# Altium PCB 10515.0502_CVSP1_2020 1P.PcbDoc (part 1 of 2)
Units mm, origin at the board's own origin, x right, y up, seen from the top; angles counter-clockwise.
Board outline 150.42 x 82.13 mm, 2 copper layers (Top Layer, Bottom Layer); 61 components, 37 nets, 190 pads, 35 vias.
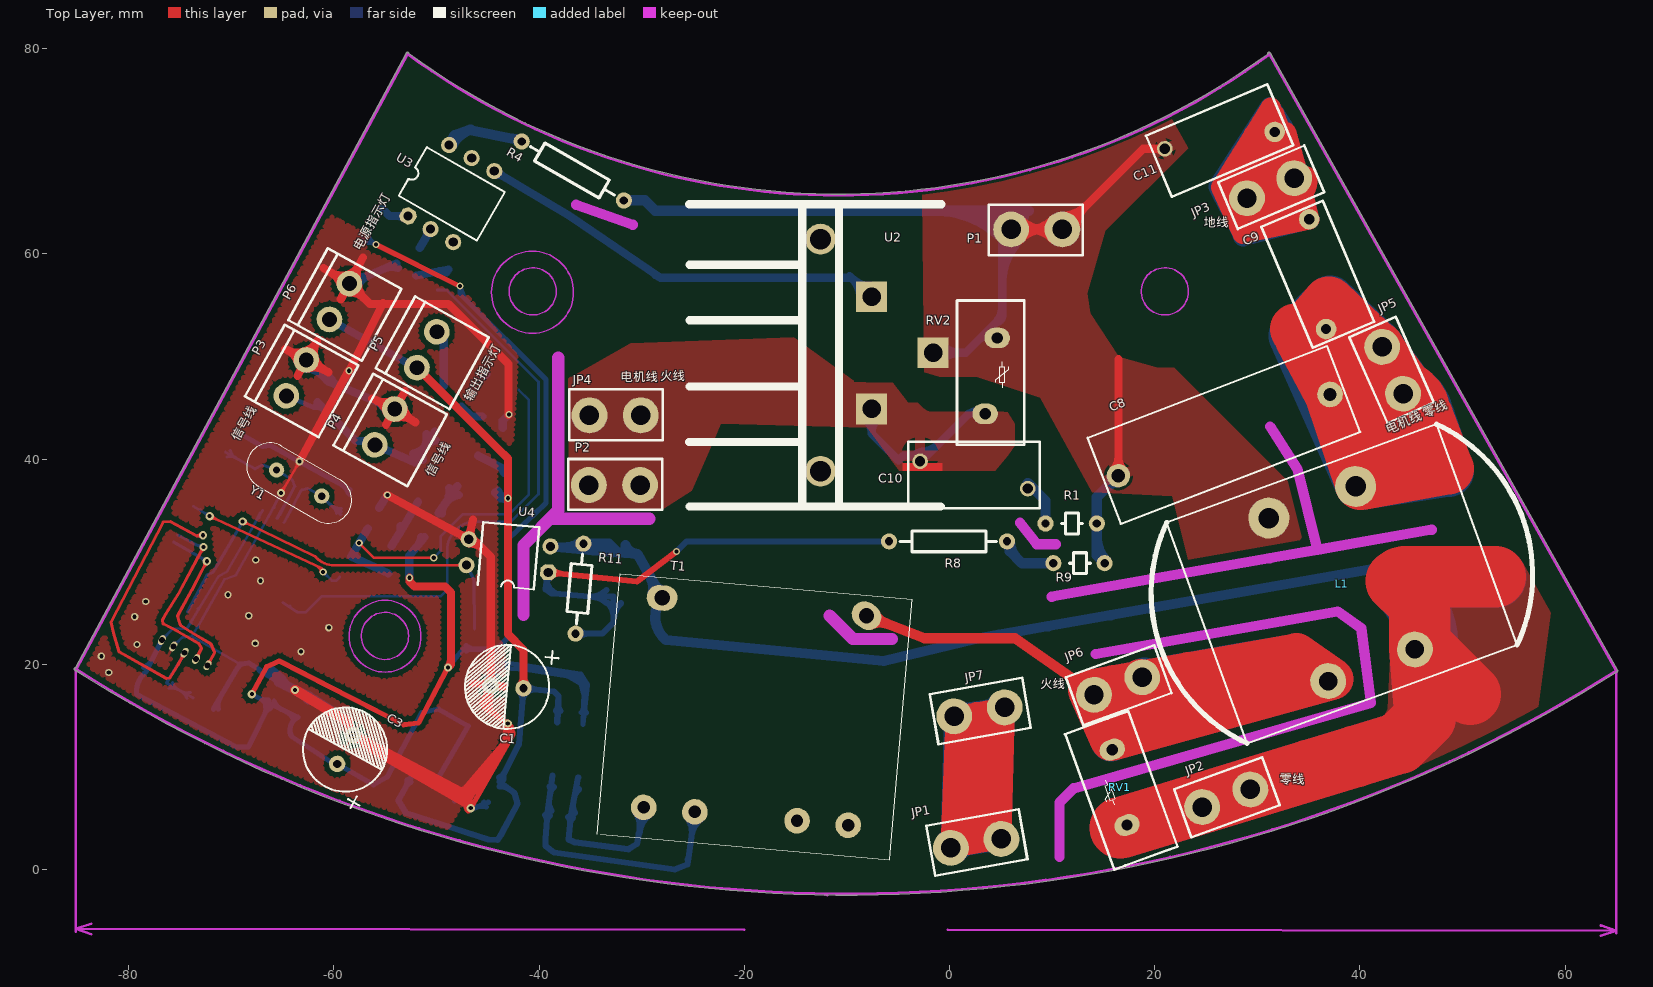
[diagram p0: Top Layer view]
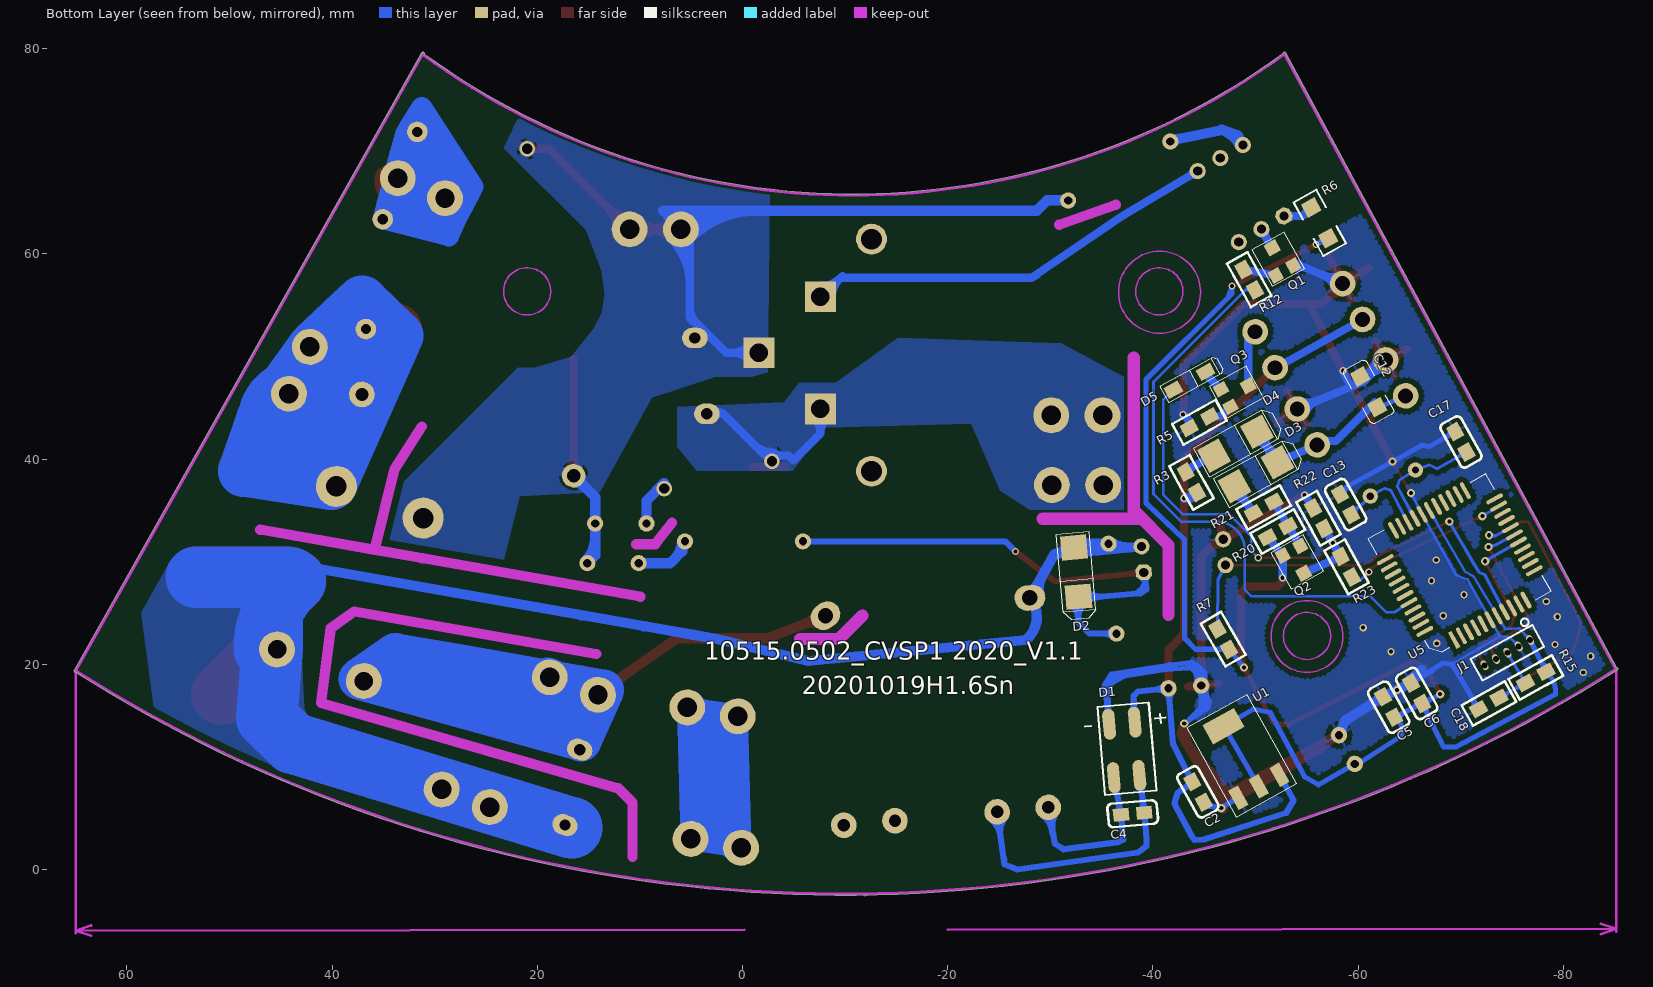
[diagram p1: Bottom Layer view, seen from below]

## Layer stack, top to bottom
Top Layer: signal copper 0.0356
Dielectric: dielectric 0.32, FR-4, Dk 4.8
Bottom Layer: signal copper 0.0356

## Board outline
-85.236,19.438 cw(c-9.954,137.626) -85.244,19.443 cw(c-85.176,19.551) -85.165,19.678 -52.966,79.507 cw(c-52.842,79.48) -52.933,79.569 cw(c-52.82,79.509) -52.695,79.53 ccw(c-10.798,136.693) 31.018,79.471 cw(c31.139,79.509) 31.25,79.571 31.268,79.54 cw(c31.19,79.439) 31.316,79.454 65.097,19.434 cw(c64.986,19.371) 65.113,19.371 cw(c64.986,19.371) 65.053,19.263 cw(c-9.954,137.626) -85.119,19.364 cw(c-85.12,19.491)

## Design rules (kind name [scope] priority, off if disabled: settings)
Clearance Clearance_2 [InPolygon] p1: gap=0.5
Clearance [All] p2: gap=0.2
HoleSize [All] p1 off: absolutevalues=TRUE maxlimit=4.54 minlimit=0.025 maxpercent=80.000 minpercent=20.000
HoleToHoleClearance [All] p1 off: gap=0.254 allowstackedmicrovias=TRUE
LayerPairs [All] p1 off: enforce=TRUE
MinimumSolderMaskSliver [All] p1 off: minsoldermaskwidth=0.254
NetAntennae [All] p1 off: netantennaetolerance=0
PlaneConnect [InNet('GND')] p1: planeconnectstyle=Direct reliefexpansion=0.508 reliefentries=4 reliefconductorwidth=0.254 reliefairgap=0.254
PolygonConnect PolygonConnect_5 [(InNet('EARTH'))] p1: connectstyle=Direct reliefconductorwidth=0.254 reliefentries=4 polygonreliefangle="90 Angle"
PolygonConnect PolygonConnect_4 [(HasFootprint('CAP/1KV'))] p2: connectstyle=Relief reliefconductorwidth=1 reliefentries=4 polygonreliefangle="90 Angle"
PolygonConnect PolygonConnect_3 [(HasFootprint('10D471'))] p3: connectstyle=Relief reliefconductorwidth=1 reliefentries=4 polygonreliefangle="90 Angle"
PolygonConnect PolygonConnect_2 [(HasFootprint('CAP/0.47U/250V'))] p4: connectstyle=Relief reliefconductorwidth=1 reliefentries=4 polygonreliefangle="90 Angle"
PolygonConnect PolygonConnect_1 [All vs InNet('MOTO_A')  Or InNet( MOTO_B)  Or InNet( L_DETECT)] p5: connectstyle=Direct reliefconductorwidth=0.254 reliefentries=4 polygonreliefangle="90 Angle"
PolygonConnect [All vs Isvia] p6: connectstyle=Direct reliefconductorwidth=0.254 reliefentries=4 polygonreliefangle="90 Angle"
RoutingVias [All] p1: holewidth=0.4 width=0.8 viastyle="Through Hole" minholewidth=0.3 minwidth=0.3 maxholewidth=0.711 maxwidth=1.27
SilkToSilkClearance [All] p1 off: silktosilkclearance=0.254
SilkscreenOverComponentPads [IsPad] p1 off: minsilkscreentomaskgap=0.254
SolderMaskExpansion [All] p1: expansion=0.102
Width [All] p1: maxlimit=6 minlimit=0.254 preferedwidth=0.8
20 further rules are at their usual default settings.

## Components (designator, comment, footprint, x,y, rotation, side; value= is the part's Value field where it differs from the comment)
C1 "Cap Pol1" CAP/3.2MM*12MM*8MM -41.529,17.653 r265 top
C2 "Cap" 0805C -44.958,6.54 r331 bottom
C3 "Cap Pol1" CAP/3.2MM*12MM*8MM -59.69,10.287 r151 top
C4 "X7R/0.1uF/50V/±10%/0805" 0805C -39.179,5.524 r265 bottom
C5 "0805/105/25V" 0805C -62.42,16.828 r151 bottom
C6 "X7R/0.1uF/50V/±10%/0805" 0805C -65.151,18.161 r151 bottom
C8 "0.47uf/275v" CAP/0.47U/250V 37.084,46.291 r201 top
C9 "2.2nf/250v" CAP/1KV#1 35.052,63.373 r203 top
C10 "Cap" CAP/1KV#2 -2.877,39.785 r270 top
C11 "2.2nf/250v" CAP/1KV#3 31.686,71.882 r113 top
C12 "Cap" CAP/SMT/1206C -60.175,48.05 r241 bottom (schematic designator R6)
C13 "Cap" 0805C -58.229,36.576 r151 bottom
C17 "Cap" 0805C -69.469,42.672 r151 bottom
C18 "0805/104/25V" 0805R -71.755,15.621 r61 bottom
D1 "Bridge2" MB6S(SMT-4) -36.195,8.954 r85 bottom
D2 "IN4007" M7 -32.322,31.369 r175 bottom
D3 "M7" M7 -47.95,37.35 r61 bottom (schematic designator D2)
D4 "M7" M7 -45.975,40.325 r61 bottom (schematic designator D2)
D5 "1N4148/SOD-123" D/SMT/SOD-123 -43.575,47.625 r331 bottom
J1 "CON5" CON_LCD3 -76.772,22.352 r241 bottom
JP1 "AC-220V" CON-1PIN 5.05,2.975 r280 top
JP2 "AC-220V" CON-1PIN 29.316,7.794 r290 top
JP3 "EARTH" CON-1PIN 33.591,67.373 r293 top
JP4 "MOTO_A" CON-1PIN -30.099,44.259 r270 top
JP5 "MOTO_B" CON-1PIN 42.164,50.927 r24 top
JP6 "MOTO_A" CON-1PIN 18.775,18.725 r290 top
JP7 "MOTO_A" CON-1PIN 5.38,15.791 r280 top (schematic designator JP1)
L1 "10mh" L1 39.575,37.325 r110 top
P1 "Header 1" CON/1PIN 5.994,62.382 r90 top
P2 "Header 1" CON/1PIN -30.162,37.465 r270 top
P3 "Header 2" CON-4.0MM*2 -62.704,49.657 r241 top locked
P4 "Header 2" CON-4.0MM*2 -54.075,44.875 r241 top
P5 "Header 2" CON-4.0MM*2 -49.975,52.4 r241 top
P6 "Header 2" CON-4.0MM*2 -58.5,57.1 r241 top
Q1 "NPN_SS8050" BJT/SMT/SOT-23 -51.975,57.9 r151 bottom
Q2 "PNP_SS8550" BJT/SMT/SOT-23 -54.375,31.525 r331 bottom (schematic designator Q1)
Q3 "NPN_SS8050" BJT/SMT/SOT-23 -46.625,46.8 r241 bottom
R1 "RES" R(DIP/0.25W) 14.351,33.718 r270 top
R3 "Res1" 0805R -43.2,38.725 r151 bottom
R4 "200R/AXIAL0.4/0.5w" RDIP/0.4/0.5W -41.7,70.95 r60 top
R5 "Res1" 0805R -43.55,43.025 r61 bottom
R6 "Res1" 1206R -57.1,61.525 r61 bottom
R7 "0805/10K/1/8W" 0805R -46.291,23.431 r150 bottom
R8 "47K/axial0.4/1W" RDIP/0.4/0.5W 5.6,31.975 r270 top
R9 "47K/axial0.4/1W" R(DIP/0.25W) 15.113,29.845 r270 top
R11 "10K/axial0.3/0.25W" R[DIP/0.3/0.25W] -35.687,31.75 r355 top
R12 "Res1" 0805R -49.95,56.475 r331 bottom
R15 "Res1" 0805R -76.327,18.161 r61 bottom
R20 "Res2" 0805R -53.175,33.475 r241 bottom (schematic designator R12)
R21 "Res2" 0805R -49.8,34.725 r61 bottom (schematic designator R12)
R22 "Res2" 0805R -55.6,35.225 r151 bottom (schematic designator R12)
R23 "Res2" 0805R -59.425,28.5 r331 bottom (schematic designator R12)
RV1 "471D14" RES/RY/TDK471KD14 16.575,8 r110 top
RV2 "471D14" RES/RY/TDK471KD14 4.05,48.1 r270 top
T1 "Trans3 Ideal" TRANS1 -19.875,17.209 r355 top locked
U1 "SPX1117M3-L-3-3/TR" SOT-223 -48.323,6.985 r151 bottom
U2 "BT136-600D" BTA41_800B -7.906,50.368 r90 top
U3 "EL3051" MOC3052(DIP-6) -52.775,63.675 r330 top
U4 "PC817" PC817(DIP-4) -39.116,28.956 r85 top
U5 "PIC16LF1937" TQFP44 -69.913,29.654 r61 bottom locked
Y1 "4MHZ" Y1(DIP-5.08MM) -65.596,38.925 r240 top locked

## Footprints (in the part's own frame and the unit in brackets; to place one, negate y for a bottom-side part, rotate by r counter-clockwise, add the part's x,y. Pads: shape width x height; smd on the part's side, far side on the other; paste and mask are expansions set on the pad)
0805C [mil]
  rect 50x60 smd: 1(0,0) 2(0,-90)
  silkscreen extent -45,-140 45,50
0805R [mil]
  rect 50x60 smd: 1(0,0) 2(0,-90)
  silkscreen extent -45,-140 45,50
1206R [mm]
  rect 1.5x1.5 smd: 1(0,0) 2(3.429,0)
  silkscreen extent -1.27,-1.27 4.7,1.27
BJT/SMT/SOT-23 [mm] "transistor 1base 2emitter 3collector"
  rect 1.143x1.27 smd: 1(0,0) 2(1.95,0)
  rect 1.27x1.27 smd: 3(1,2.5)
  silkscreen extent -0.78,-0.8 2.78,3.26, body extent -1.24,-1.1 3.22,3.3, height 1.2
BTA41_800B [mm]
  rect 3x3 hole 1.8: 1(-5.488,-0.3) 2(0,-6.3) 3(5.45,-0.3)
  round 3 hole 2: 4(-11.553,4.675) 5(11.073,4.675)
  silkscreen extent -14.99,-7.12 14.47,17.5
CAP/0.47U/250V [mm]
  round 2.5 hole 1.3: 1(0,0)
  round 2.286 hole 1.3: 2(22.1,0)
  silkscreen extent -1.43,-4.53 23.57,4.47
CAP/1KV#1 [mm]
  round 2 hole 1: 1(0,0) 2(2.667,10.5)
  silkscreen extent -1.9,-1.14 4.57,11.68
CAP/1KV#2 [mm]
  round 1.524 hole 1: 1(0,0) 2(2.667,10.5)
  silkscreen extent -1.91,-1.14 4.57,11.68
CAP/1KV#3 [mm]
  round 2 hole 1: 1(0,0)
  round 1.524 hole 1: 2(2.667,10.5)
  silkscreen extent -1.9,-1.14 4.57,11.68
CAP/3.2MM*12MM*8MM [mm]
  round 1.6 hole 0.8: 1(0,0) 2(0,-3.2)
  silkscreen extent -4.1,-5.7 4.1,3.13
CAP/SMT/1206C [mm]
  rect 1.5x1.5 smd: 1(0.026,0.025) 2(3.455,0.025)
  silkscreen extent -1.25,-1.24 4.73,1.3, body extent -1.14,-2.67 4.58,2.69, height 0.95
CON-1PIN [mm]
  round 3.5 hole 1.9: 1(0,0) 2(0,-5)
  silkscreen extent -2.54,-6.98 2.41,2.16
CON-4.0MM*2 [mm]
  round 2.5 hole 1.45: 1(0,0) 2(4,0)
  silkscreen extent -2,-3.5 6,4.7
CON/1PIN [mm]
  round 3.5 hole 1.9: 1(0,0) 2(0,-5)
  silkscreen extent -2.54,-6.98 2.41,2.16
CON_LCD3 [mm]
  oval 1x0.6 hole 0.58: 1(0,0) 2(0,-1.27) 3(0,-2.54) 4(0,-3.81) 5(0,-5.08)
  silkscreen extent -2.15,-5.98 1.2,0.9
D/SMT/SOD-123 [mm]
  rect 1.6x1.2 smd: 1(-1.8,0) 2(1.8,0)
  silkscreen extent -3.43,-0.9 2.78,0.9, body extent -2.24,-2 2.13,2.07, height 1.2
L1 [mm]
  round 3.5 hole 1.8: 1(-16.905,9) 2(-16.905,0)
  round 4 hole 2: 3(0,0) 4(0,9)
  silkscreen extent -19.91,-14.24 3,23.24
M7 [mm]
  rect 2.54x2.4 smd: 1(0,0) 2(0,-4.8)
  silkscreen extent -1.6,-6.99 1.6,1.4
MB6S(SMT-4) [mm]
  oval 3x1.2 smd: 1(0,0) 2(0,-2.5) 3(5.2,-2.5) 4(5.2,0)
  silkscreen extent -1.62,-5.55 6.99,2.35
MOC3052(DIP-6) [mil]
  oct 62x62 hole 35: 1(0,0)
  round 62 hole 35: 2(100,0) 3(200,0) 4(200,314.96) 5(100,314.96) 6(0,314.96)
  silkscreen extent -70,50 275,265
PC817(DIP-4) [mil]
  oct 62x62 hole 35: 1(0,0)
  round 62 hole 35: 2(100,0) 3(100,314.96) 4(0,314.96)
  silkscreen extent -70,50 170,265
R(DIP/0.25W) [mil]
  round 62 hole 32: 1(0,0) 2(0,-196.85)
  silkscreen extent -40,-135 40,-55
R[DIP/0.3/0.25W] [mil]
  round 62 hole 32: 1(0,0) 2(0,-346.46)
  silkscreen extent -40,-310 40,-40
RDIP/0.4/0.5W [mil]
  round 62 hole 32: 1(0,0) 2(0,-452.76)
  silkscreen extent -40,-410 40,-40
RES/RY/TDK471KD14 [mm]
  oval 2x2.5 hole 1.1: 1(-3.7,0.584) 2(3.701,-0.583)
  silkscreen extent -7.35,-3.33 6.7,3.23
SOT-223 [mm]
  rect 1.1x2.15 smd: 1(0,0) 2(2.3,0) 3(4.6,0)
  rect 3.5x2.15 smd: 4(2.15,6.8)
  silkscreen extent -1.05,-1.58 5.65,8.37
TQFP44 [mm]
  rect 1.8x0.4 smd: 1(-6.1,4)
  oval 1.8x0.4 smd: 2(-6.1,3.2) 3(-6.1,2.4) 4(-6.1,1.6) 5(-6.1,0.8) 6(-6.1,0) 7(-6.1,-0.8) 8(-6.1,-1.6) 9(-6.1,-2.4) 10(-6.1,-3.2) 11(-6.1,-4) 23(6.1,-4) 24(6.1,-3.2) 25(6.1,-2.4) 26(6.1,-1.6) 27(6.1,-0.8) 28(6.1,0) 29(6.1,0.8) 30(6.1,1.6) 31(6.1,2.4) 32(6.1,3.2) 33(6.1,4)
  oval 0.4x1.8 smd: 12(-4,-6.1) 13(-3.2,-6.1) 14(-2.4,-6.1) 15(-1.6,-6.1) 16(-0.8,-6.1) 17(0,-6.1) 18(0.8,-6.1) 19(1.6,-6.1) 20(2.4,-6.1) 21(3.2,-6.1) 22(4,-6.1) 34(4,6.1) 35(3.2,6.1) 36(2.4,6.1) 37(1.6,6.1) 38(0.8,6.1) 39(0,6.1) 40(-0.8,6.1) 41(-1.6,6.1) 42(-2.4,6.1) 43(-3.2,6.1) 44(-4,6.1)
  silkscreen extent -6.55,-6.55 6.55,6.55
TRANS1 [mm]
  oval 3x2.5 hole 1.5 rot 145: 1(11.081,8.521)
  oval 3x2.5 hole 1.5: 2(-8.919,8.52)
  round 2.5 hole 1.2: 3(-8.919,-11.98) 4(-3.919,-11.98) 5(6.081,-11.98) 6(11.081,-11.98)
  silkscreen extent -13.21,-14.98 15.39,10.52
Y1(DIP-5.08MM) [mm]
  round 1.5 hole 0.711: 1(0,0) 2(0,5.08)
  silkscreen extent -2.27,-3.02 2.27,8.1

## Part data
C1 C3: "Polarized Capacitor (Radial)"
C2 C10 C12 C13 C17: "Capacitor"
C4 C5 C6 C18: library part Cap, "Capacitor"
C8 C9 C11: library part CAP, "Capacitor"
D1: "Diode Bridge"
D2: library part DIODE, "Diode"
D3 D4: library part "Diode 1N4007", "1 Amp General Purpose Rectifier"
D5: library part D/D/SMT/1N4148/SOD-123, "VR=75V T(-65-175)P(0.5W)VF=0.6V"
J1: "Connector"
JP1 JP2 JP3 JP4 JP5 JP6 JP7: library part "Header 2", "Header, 2-Pin"
L1: library part INDUCTANCE
P1 P2 P3 P4 P5 P6: "Header, 2-Pin"
Q1 Q3: library part BJT/NPN/SMT/SS8050/SOT-23
Q2: library part BJT/PNP/SMT/SS8550/SOT-23, "Vce25V/Vcb40V/Veb5V/Ic1.5V/Pd300mW"
R1: library part Res1, "Resistor"
R3 R5 R6 R12 R15 R20 R21 R22 R23: "Resistor"
R4 R7 R8 R9 R11: library part RES2
RV1 RV2: library part "Res Varistor", "Varistor (Voltage-Sensitive Resistor)"
T1: "Three-winding Transformer (Ideal)"
U1: library part SPX3117, "Voltage Regulator"
U2: library part TRIAC
U3: library part MOC3043
U4: library part OPTOISO1, "Optoisolator"
U5: "Flash-Based, 8-Bit CMOS Microcontroller with LCD Driver and nanoWatt Technology, 4K (x14-Bit words) Program Memory, 512 Bytes Data Memory, 35 I/O pins, 44-Pin TQFP, Standard VDD Range, Extended Temperature"
Y1: library part XTAL, "Crystal Oscillator"

## Free pads (board coordinates)
  round 1 on Top Overlay: 2(-41.275,26.416)

## Via types
v1: diameter 0.7, hole 0.4, Top Layer to Bottom Layer, tented both sides, 23 vias
v2: diameter 0.8, hole 0.4, Top Layer to Bottom Layer, tented both sides, 12 vias

## Nets (pads, with @x,y where several pads share a name; then routed paths per layer and width w, separated by ;. In a path a pad name is that pad's centre, name@x,y a point inside that pad or via, vN(x,y) a via of type N, cw(c..) or ccw(c..) an arc to the next point about the centre after c; other vN are vias at no path point)
+3.3V: C3.1 C5.2 C6.2 J1.1 Q2.2 R6.1 R7.2 R15.2 R20.2 U1.2 U1.4 U5.7 U5.28 | length 193.6
  Top Layer w0.508: v2(-68.008,17.081) -66.548,19.748 -65.341,20.309 -53.213,14.097 -51.752,14.287 -49.438,18.66 v2(-48.895,19.685) ; v1(-55.9,60.903) v1(-47.725,56.85)
  Top Layer w0.8: v1(-52.65,28.425) -52.65,28.075 -52.15,27.575 -49.175,27.575 -48.6,27 -48.6,19.98 v2(-48.895,19.685) ccw(c-49.607,20.397) -48.6,20.397
  Bottom Layer w0.254: J1.1@-76.772,22.352 -75.692,23.495 -74.358,23.431 U5.7@-73.571,24.707 -71.247,28.575 -70.421,29.036 -68.034,33.137 ; J1.1@-76.679,22.7 ccw(c-76.696,23.287) -76.269,22.884 ; J1.1@-76.502,22.532 cw(c-76.253,22.539) -76.434,22.709 ; -74.072,23.895 cw(c-73.827,23.743) U5.7@-73.893,24.024 ; U5.7@-73.249,25.39 ccw(c-73.312,25.642) -73.089,25.508 ; -67.521,34.104 cw(c-67.152,33.907) U5.28@-67.274,34.308 ; -67.415,34.202 cw(c-67.219,34.088) U5.28@-67.277,34.307 ; U5.28@-67.171,34.763 -68.034,33.137 ; U5.28@-66.956,34.99 -68.034,33.137
  Bottom Layer w0.508: R15.2@-78.557,19.693 ccw(c-78.98,20.978) -77.772,20.368 ; J1.1@-76.772,22.352 R15.2@-78.326,19.269 -78.504,19.092 ccw(c-76.708,17.296) -79.248,17.296 -79.248,17.081 -71.193,12.817 ; v2(-68.008,17.081) C6.2@-66.259,16.162 ; -66.726,15.207 ccw(c-67.572,15.621) C6.2@-66.681,15.927 ; -66.712,15.236 cw(c-65.906,14.841) C6.2@-66.197,15.69 ; C6.2@-66.623,16.049 ccw(c-67.502,15.776) -67.073,16.59 ccw(c-66.645,17.404) C6.2@-66.372,16.525 ; C6.2@-65.837,16.397 ccw(c-64.558,16.836) -65.152,15.621 ; -64.636,15.369 cw(c-65.23,14.153) C5.2@-63.951,14.593 ; C3.1@-59.69,10.287 -56.134,8.255 -54.8,9.017 -51.435,15.303 -49.784,15.621 U1.4@-46.907,13.975 U1.2@-50.335,8.1 ; C3.1@-59.627,10.033 -59.787,10.137 -64.135,12.954 cw(c-62.895,13.588) C5.2@-63.529,14.828 C6.2@-66.259,16.162 ; R6.1@-57.1,61.525 v1(-55.9,60.903) ; R6.1@-56.95,61.053 cw(c-56.588,59.911) -56.037,60.974 cw(c-55.486,62.037) R6.1@-56.627,61.675 ; U1.2@-50.156,8.846 ccw(c-50.348,9.575) -49.696,9.195 ; U1.2@-49.794,8.635 cw(c-49.141,8.806) -49.725,9.146 ; v2(-48.895,19.685) -48.114,20.629 R7.2@-47.435,21.452 -44.173,21.452 -43.075,22.55 -43.075,32.175 -39.325,35.725 -39.346,47.758 -47.299,55.683 ; v1@-47.725,56.8 -47.299,55.683 ; v1(-47.725,56.85) -47.723,56.105 -47.299,55.683 ; R7.2@-47.102,21.292 cw(c-46.717,20.907) R7.2@-46.717,21.452 ; R7.2@-47.102,21.831 ccw(c-46.186,22.747) -46.186,21.452 ; -71.193,12.817 -70.549,12.446 -70.468,12.433 ; -71.193,12.817 -70.468,12.433 ; -70.468,12.433 -69.532,11.938 -68.326,11.938 C6.2@-66.259,16.162
  Bottom Layer w0.8: v1(-52.65,28.425) -52.669,28.444 Q2.2@-52.669,30.58 R20.2@-51.176,32.367 ; -51.748,31.682 ccw(c-52.51,32.319) R20.2@-51.521,32.407
+12V: C1.1 C2.2 D1.3 P5.2 P6.2 R3.2 U1.3 | length 101
  Top Layer w0.8: P5.2@-51.914,48.902 -44.064,41.051 -43.05,40.037 v1(-43.05,36.175) -43.05,22.929 -41.529,21.408 C1.1@-41.529,17.653 ; C1.1@-41.812,17.936 ccw(c-42.495,18.619) -41.529,18.619 ccw(c-40.563,18.619) C1.1@-41.246,17.936
  Bottom Layer w0.6: -52.894,8.227 ccw(c-53.423,8.52) U1.3@-52.842,8.687 ; -52.893,8.229 cw(c-52.366,7.937) U1.3@-52.532,8.516 ; U1.3@-52.347,9.215 -53.721,6.731 -53.023,5.528 -44.974,2.905 -44.069,2.857 -43.688,3.429 -42.1,6.413 -42.418,7.429 C2.2@-43.85,8.54 -41.974,12.192 C1.1@-41.529,17.653 -38.544,17.335 -38.1,16.891 -38.126,16.392 ; C2.2@-43.891,8.97 ccw(c-44.134,9.727) -43.427,9.364 ; C2.2@-43.869,8.096 cw(c-43.714,6.869) -42.956,7.847 ; C2.2@-43.469,8.753 cw(c-42.686,9.005) -43.418,9.381 ; C1.1@-41.91,17.329 cw(c-42.83,16.548) -41.627,16.45 cw(c-40.424,16.352) C1.1@-41.205,17.272 ; C1.1@-41.215,17.264 cw(c-40.456,16.325) -40.329,17.525 cw(c-40.201,18.726) C1.1@-41.14,17.967 ; D1.3@-38.355,15.471 ccw(c-38.767,15.929) -38.152,15.897 ; D1.3@-38.352,15.474 ccw(c-38.784,15.966) -38.13,15.924 ; -38.163,16.447 -38.165,16.406 ; -38.144,16.049 ccw(c-37.312,16.006) D1.3@-37.931,15.449 ; -38.124,16.02 ccw(c-37.333,15.969) D1.3@-37.928,15.446 ; D1.3@-38.232,14.352 -38.1,16.383 -38.126,16.392 ; D1.3@-38.232,14.352 -38.165,16.406 ; D1.3@-38.232,14.352 -38.126,16.392 ; -38.165,16.406 -38.126,16.392
  Bottom Layer w0.8: P6.2@-60.439,53.602 P5.2@-51.708,48.736 ; R3.2@-44.075,36.492 ccw(c-44.308,36.492) R3.2@-44.308,36.726 -43.758,36.175 v1(-43.05,36.175) cw(c-43.05,37.187) R3.2@-44.021,36.903 ; R3.2@-43.954,36.372 ccw(c-43.284,37.042) v1@-43.037,36.127
CONTROL: U2.3 U3.4 | length 46.4
  Bottom Layer w0.8: U3.4@-44.376,68.063 -37.02,63.691 -28.172,57.671 ; U3.4@-44.28,67.688 cw(c-44.05,66.781) -43.572,67.585 cw(c-43.094,68.389) U3.4@-44,68.159 ; -28.707,57.967 -28.172,57.671 ; -9.748,57.823 cw(c-11.553,55.615) U2.3@-8.705,55.762 ; -9.17,57.351 ccw(c-7.915,58.887) U2.3@-7.716,56.913 ; U2.3@-7.606,56.072 -9.562,57.671 -28.172,57.671
EARTH: C9.1 C11.1 JP3.1 JP3.2 | length 306.2
  Top Layer w2: JP3.2@27.789,65.069 cw(c30.576,65.884) 28.052,67.319 ; JP3.2@27.921,64.769 cw(c31.228,66.784) 27.942,68.832 ; 28.359,69.502 cw(c32.896,66.675) C11.1@31.686,71.882 ; JP3.2@28.782,66.141 ccw(c28.092,68.548) 30.282,67.334 ; JP3.2@29.353,66.076 ccw(c30.715,68.535) 31.49,65.832 ; JP3.2@29.629,65.81 cw(c34.332,68.675) 29.658,71.587 ; JP3.2@29.709,65.63 cw(c36.882,67.727) 30.386,71.422 ; 29.824,70.434 cw(c32.503,68.91) C11.1@31.686,71.882 ; 30.422,63.935 cw(c32.058,58.065) C9.1@35.052,63.373 ; 30.583,63.98 ccw(c29.746,66.981) JP3.1@32.845,67.297 ; 31.216,65.754 ccw(c30.573,67.995) JP3.1@32.857,67.525 ; 31.398,69.346 ccw(c28.481,70.963) C11.1@31.686,71.882 ; 31.713,73.368 cw(c29.906,72.657) C11.1@31.686,71.882 ; JP3.1@31.976,67.709 31.47,69.476 32.051,70.526 ; 32.718,70.813 ccw(c30.912,70.102) C11.1@31.686,71.882 ; 32.868,64.617 ccw(c32.141,67.226) JP3.1@34.835,67.5 ; JP3.1@32.904,67.673 ccw(c29.844,69.004) 32.949,70.226 ; JP3.1@32.936,67.737 ccw(c30.011,69.358) 33.225,70.28 ; JP3.1@33.205,66.731 cw(c31.484,63.865) 34.727,64.674 ; 33.374,69.76 ccw(c29.969,68.784) C11.1@31.686,71.882 ; 34.099,64.96 29.922,63.796 ; JP3.2@29.376,65.699 32.051,70.526 ; JP3.2@29.376,65.699 JP3.2@29.421,65.544 ; JP3.2@29.376,65.699 JP3.2@29.421,65.544 ; JP3.2@29.421,65.544 JP3.2@29.501,65.262 ; JP3.2@29.421,65.544 JP3.2@29.501,65.262 ; JP3.2@29.501,65.262 29.922,63.796 ; JP3.2@29.501,65.262 29.922,63.796 ; JP3.2@29.501,65.262 30.967,65.682 ; 29.922,63.796 30.391,64.643 30.967,65.682 ; 29.922,63.796 28.784,65.261 27.686,66.675 30.902,72.328 31.456,73.303 ; 30.967,65.682 31.385,66.436 33.672,67.092 JP3.1@34.094,67.213 ; 30.967,65.682 33.686,66.462 34.05,67.119 JP3.1@34.097,67.202 ; 31.456,73.303 C11.1@31.686,71.882 ; 31.456,73.303 31.305,74.231 30.358,72.71 26.703,66.844 26.479,66.484 27.332,64.65 28.575,61.976 C9.1@35.052,63.373 ; 31.456,73.303 31.623,73.596 32.216,72.09 C11.1@32.508,71.349 ; 32.051,70.526 C11.1@32.508,71.349 ; C11.1@32.508,71.349 32.541,71.409 32.779,71.838 JP3.1@34.023,67.497 ; C11.1@32.508,71.349 34.007,67.537 JP3.1@34.023,67.497 ; JP3.1@34.023,67.497 JP3.1@34.104,67.216 ; JP3.1@34.023,67.497 34.027,67.482 JP3.1@34.094,67.213 ; JP3.1@34.094,67.213 JP3.1@34.097,67.202 ; JP3.1@34.094,67.213 JP3.1@34.104,67.216 ; JP3.1@34.097,67.202 C9.1@35.052,63.373 ; JP3.1@34.097,67.202 JP3.1@34.104,67.216 ; JP3.2@29.645,65.056 cw(c32.173,63.655) 31.376,66.433 ccw(c32.173,63.655) JP3.2@29.645,65.056
  Bottom Layer w2: JP3.2@27.787,65.077 cw(c30.833,65.945) 28.132,67.601 ; 28.062,69.384 cw(c32.89,66.257) C11.1@31.686,71.882 ; JP3.2@28.126,64.516 ccw(c31.198,67.735) 31.302,63.286 ; JP3.2@28.678,66.102 ccw(c27.552,68.572) 30.094,67.622 ; JP3.2@28.782,66.141 ccw(c28.092,68.548) 30.282,67.334 ; JP3.2@28.825,66.659 cw(c29.264,63.339) 31.77,65.56 ; JP3.2@29.286,64.731 cw(c30.673,61.509) 33.298,63.836 ; JP3.2@29.318,64.746 cw(c30.699,61.924) 31.718,64.895 ; JP3.2@29.501,65.262 29.421,65.544 JP3.2@29.376,65.699 ; JP3.2@29.71,65.625 cw(c36.783,67.641) 30.513,71.484 ; 30.01,70.664 cw(c32.318,69.25) C11.1@31.686,71.882 ; 31.297,74.208 cw(c28.684,72.574) C11.1@31.686,71.882 ; 31.648,73.381 cw(c29.858,72.585) C11.1@31.686,71.882 ; 31.884,70.224 ccw(c30.636,70.916) C11.1@31.686,71.882 ; 32.773,70.849 ccw(c30.983,70.054) C11.1@31.686,71.882 ; 32.812,70.763 cw(c29.086,69.107) JP3.1@32.891,67.643 ; 32.888,69.147 33.068,69.199 33.457,69.311 ; JP3.1@32.936,67.737 ccw(c30.011,69.358) 33.225,70.28 ; JP3.1@32.942,67.748 ccw(c30.27,69.288) 33.248,70.088 ; JP3.1@33.217,66.724 cw(c31.677,64.052) 34.655,64.852 ; 33.347,69.72 ccw(c29.908,68.797) C11.1@31.686,71.882 ; 33.374,69.76 ccw(c29.969,68.784) C11.1@31.686,71.882 ; 33.5,69.323 33.457,69.311 ; 34.055,64.69 cw(c35.42,65.724) JP3.1@34.148,66.871 ; JP3.1@34.104,67.216 34.023,67.497 32.779,71.838 ; 28.01,63.148 28.639,61.722 C9.1@35.052,63.373 ; 28.01,63.148 27.287,64.526 26.226,66.548 30.272,72.798 31.242,74.295 ; 28.01,63.148 27.331,64.689 26.987,65.468 27.392,66.248 27.877,67.183 31.01,72.296 31.472,73.049 ; JP3.2@29.376,65.699 C11.1@31.686,71.882 ; JP3.2@29.376,65.699 32.639,64.579 31.671,65.672 30.616,66.862 30.25,67.275 ; JP3.2@29.376,65.699 30.25,67.275 ; JP3.2@29.376,65.699 29.397,65.456 29.591,63.246 C9.1@35.052,63.373 ; 30.25,67.275 31.03,68.683 ; 31.03,68.683 C11.1@32.532,71.393 ; 31.03,68.683 32.594,66.618 C9.1@35.052,63.373 ; 31.242,74.295 31.472,73.049 ; 31.242,74.295 C11.1@31.994,72.603 ; 31.242,74.295 32.452,72.36 32.779,71.838 ; 31.472,73.049 C11.1@31.686,71.882 ; 31.472,73.049 31.496,73.088 C11.1@31.994,72.603 ; C11.1@31.994,72.603 32.211,72.115 C11.1@32.532,71.393 ; C11.1@31.994,72.603 32.197,72.405 32.779,71.838 ; C11.1@32.532,71.393 33.457,69.311 ; C11.1@32.532,71.393 32.541,71.409 32.779,71.838 ; 32.779,71.838 33.457,69.311 ; 33.457,69.311 33.952,67.47 C9.1@35.052,63.373 ; JP3.2@28.495,66.568 cw(c29.521,64.184) 31.464,65.905 ccw(c29.521,64.184) JP3.2@28.495,66.568